# Altium PCB MAX21000.PcbDoc
Units mm, origin at the board's own origin, x right, y up, seen from the top; angles counter-clockwise.
Board outline 20 x 23 mm, 2 copper layers (Top Layer, Bottom Layer); 6 components, 8 nets, 32 pads, 9 vias.
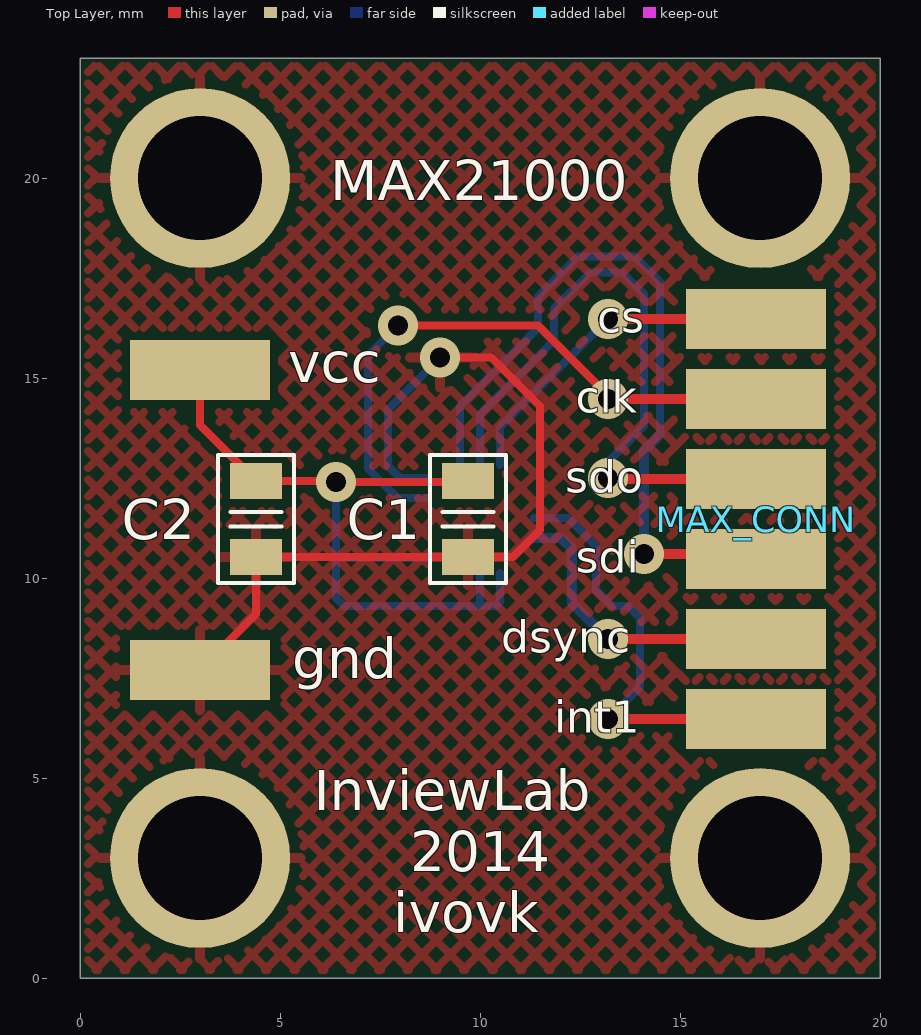
[diagram p0: Top Layer view]
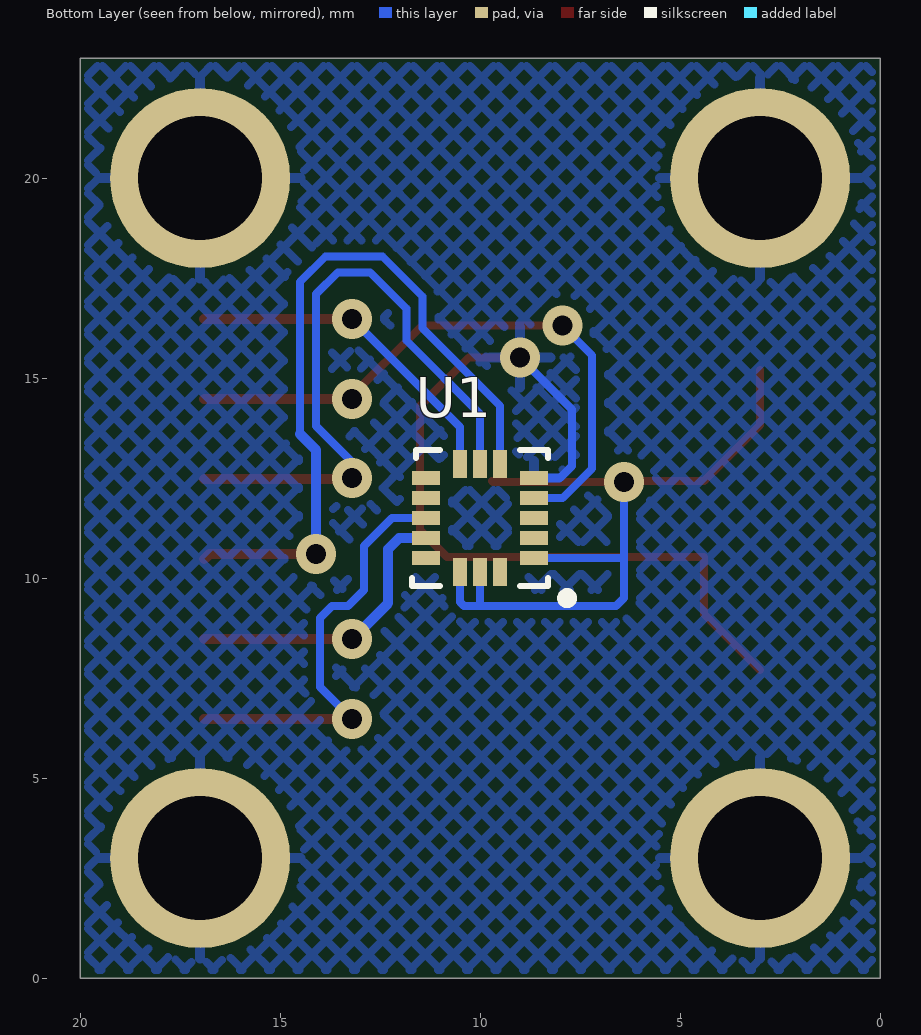
[diagram p1: Bottom Layer view, seen from below]

## Layer stack, top to bottom
Top Solder: solder mask 0.0102, Solder Resist, Dk 3.5
Top Layer: signal copper 0.0356
Dielectric 1: dielectric 0.32, FR-4, Dk 4.8
Bottom Layer: signal copper 0.0356
Bottom Solder: solder mask 0.0102, Solder Resist, Dk 3.5

## Board outline
0,0 0,23 20,23 20,0

## Design rules (kind name [scope] priority, off if disabled: settings)
Clearance [All] p1: gap=0.2 except(0.1: Track-SMDPad SMDPad-SMDPad SMDPad-THPad; 0.3: SMDPad-Via)
PolygonConnect [All] p1: connectstyle=Relief reliefconductorwidth=0.254 reliefentries=4 polygonreliefangle="90 Angle" airgapwidth=0.254
RoutingVias [All] p1: holewidth=0.5 width=1 viastyle="Through Hole" minholewidth=0.5 minwidth=1 maxholewidth=0.5 maxwidth=1
SolderMaskExpansion [All] p1: expansion=0.1
UnpouredPolygon [All] p1: allowunpoured=FALSE
Width [All] p1: maxlimit=0.5 minlimit=0.15 preferedwidth=0.2
29 further rules are at their usual default settings.

## Components (designator, comment, footprint, x,y, rotation, side; value= is the part's Value field where it differs from the comment)
C1 "1uF" C_0805 9.7,11.475 r90 top
C2 "0.1uF" C_0805 4.4,11.475 r90 top
gnd "1_pin_plate_conn" 1_pin_plate_conn 3,7.7 r0 top
MAX_CONN "6_pin_plate_conn" 6_pin_plate_conn 16.9,11.475 r0 top
U1 "MAX21000+" PQFN50P300X300X100-16N 10,11.5 r0 bottom
vcc "1_pin_plate_conn" 1_pin_plate_conn 3,15.2 r180 top

## Footprints (in the part's own frame and the unit in brackets; to place one, negate y for a bottom-side part, rotate by r counter-clockwise, add the part's x,y. Pads: shape width x height; smd on the part's side, far side on the other; paste and mask are expansions set on the pad)
1_pin_plate_conn [mm]
  rect 3.5x1.5 smd: 1(0,0)
6_pin_plate_conn [mm]
  rect 3.5x1.5 smd: 1(0,5) 2(0,3) 3(0,1) 4(0,-1) 5(0,-3) 6(0,-5)
C_0805 [mm] "Capacitor Pattern"
  rect 0.9x1.3 smd: 1(-0.95,0) 2(0.95,0)
  silkscreen extent -1.6,-0.95 1.6,0.95, body extent -1,-0.63 1,0.62, height 0.6
PQFN50P300X300X100-16N [mm] "PQFN, 16-Leads, Body 3.00x3.00mm, Pitch 0.50mm, IPC Medium Density"
  rect 0.7x0.35 smd: 1(-1.35,1) 2(-1.35,0.5) 3(-1.35,0) 4(-1.35,-0.5) 5(-1.35,-1) 9(1.35,-1) 10(1.35,-0.5) 11(1.35,0) 12(1.35,0.5) 13(1.35,1)
  rect 0.35x0.7 smd: 6(-0.5,-1.35) 7(0,-1.35) 8(0.5,-1.35) 14(0.5,1.35) 15(0,1.35) 16(-0.5,1.35)
  silkscreen extent -2.3,-1.7 1.7,2.12, body extent -1.5,-1.5 1.5,1.5, height 0.91

## Part data
C1 C2: library part CAP_SMD_0805, "Capacitor"
U1: library part max21000, "3-axis digital gyroscope"

## Free pads (board coordinates)
  round 4.5 hole 3.1: 1(3,3) 1(3,20) 1(17,3) 1(17,20)

## Via types
v1: diameter 1, hole 0.5, Top Layer to Bottom Layer, tented both sides, 9 vias

## Nets (pads, with @x,y where several pads share a name; then routed paths per layer and width w, separated by ;. In a path a pad name is that pad's centre, name@x,y a point inside that pad or via, vN(x,y) a via of type N, cw(c..) or ccw(c..) an arc to the next point about the centre after c; other vN are vias at no path point)
C\S\: MAX_CONN.1 U1.8 | length 8.5
  Top Layer w0.254: v1(13.2,16.474) MAX_CONN.1
  Bottom Layer w0.2: U1.8@10.5,12.825 10.5,13.775 v1(13.2,16.474)
CLK: MAX_CONN.2 U1.4 | length 15.5
  Top Layer w0.2: v1(7.947,16.317) 11.445,16.317 v1@13.287,14.474
  Top Layer w0.254: v1(13.2,14.474) 13.287,14.474 MAX_CONN.2
  Bottom Layer w0.2: v1(7.947,16.317) 7.2,15.571 7.2,12.734 7.934,12 U1.4
DSYNC: MAX_CONN.5 U1.12 | length 7.4
  Top Layer w0.254: v1(13.2,8.475) MAX_CONN.5
  Bottom Layer w0.254: U1.12 12.029,11 12.3,10.729 12.3,9.375 v1(13.2,8.475)
GND: C1.1 C2.1 gnd.1 pad.1 U1.5 | length 21.2
  Top Layer w0.2: gnd.1 4.4,9.1 C2.1 C1.1 10.824,10.524 11.5,11.2 11.5,14.3 10.283,15.517 v1(9.001,15.517)
  Bottom Layer w0.2: U1.5 8,12.5 7.7,12.8 7.7,14.216 v1(9.001,15.517)
INT1: MAX_CONN.6 U1.11 | length 10.9
  Top Layer w0.254: v1(13.2,6.475) MAX_CONN.6
  Bottom Layer w0.2: U1.11 12.2,11.5 12.9,10.8 12.9,9.7 13.3,9.3 13.7,9.3 14,9 14,7.275 v1(13.2,6.475)
SDI: MAX_CONN.4 U1.6 | length 18.6
  Top Layer w0.254: v1(14.1,10.6) 16.775,10.6 MAX_CONN.4
  Bottom Layer w0.2: U1.6@9.5,12.825 9.5,14.307 11.446,16.254 11.446,17.046 12.446,18.046 13.861,18.046 14.5,17.407 14.5,13.6
  Bottom Layer w0.254: v1(14.1,10.6) 14.1,13.2 14.5,13.6
SDO: MAX_CONN.3 U1.7 | length 16.2
  Top Layer w0.254: v1@13.2,12.474 MAX_CONN.3
  Bottom Layer w0.2: U1.7@10,12.825 10,14.1 11.846,15.946 11.846,16.739 12.754,17.646 13.554,17.646 14.1,17.1 14.1,13.804 13.2,12.904 v1(13.2,12.5)
VDD_3.3: C1.2 C2.2 U1.1 U1.14 U1.15 vcc.1 | length 19.5
  Top Layer w0.2: vcc.1 3,13.825 C2.2 v1@6.4,12.425 ; v1(6.4,12.4) 9.676,12.4 C1.2
  Bottom Layer w0.2: 6.4,10.5 U1.1 ; v1(6.4,12.4) 6.4,9.5 6.6,9.3 7.3,9.3 10.4,9.3 10.5,9.4 U1.14@10.5,10.124 ; 10,9.4 U1.15@10,10.124
pads on no net: U1.2 U1.3 U1.9 U1.10 U1.13 U1.16

## Polygon pours and split planes (outlines as drawn)
GND on Bottom Layer "top_gnd_polygon" (hatched 45Degree grid 0.5 track 0.2, pour order 2): 0.2,22.8 0.2,0.2 19.8,0.2 19.8,22.8
GND on Top Layer "top_gnd_polygon" (hatched 45Degree grid 0.5 track 0.2, pour order 4): 0.2,22.8 0.2,0.2 19.8,0.2 19.8,22.8

## Silkscreen, mask and mechanical layers (free items; w line width, h text height)
Top Overlay:
  text "MAX21000" at 6.251,19.449 h1
  text "cs" at 12.924,16.133 h0.8
  text "clk" at 12.391,14.133 h0.8
  text "sdo" at 12.124,12.133 h0.8
  text "sdi" at 12.391,10.133 h0.8
  text "dsync" at 10.525,8.133 h0.8
  text "int1" at 11.858,6.133 h0.8
  text "InviewLab" at 5.835,4.191 h1
  text "2014" at 8.251,2.667 h1
  text "ivovk" at 7.834,1.143 h1
Mechanical 13:
  the board outline again, w0.254